# Altium PCB PCB_2021-01-04_23-32-29_2021-01-05_00-56-48.pcbdoc
Units mm, origin at the board's own origin, x right, y up, seen from the top; angles counter-clockwise.
Board outline 70 x 40 mm, 2 copper layers (Top Layer, Bottom Layer); 93 components, 84 nets, 344 pads, 48 vias.
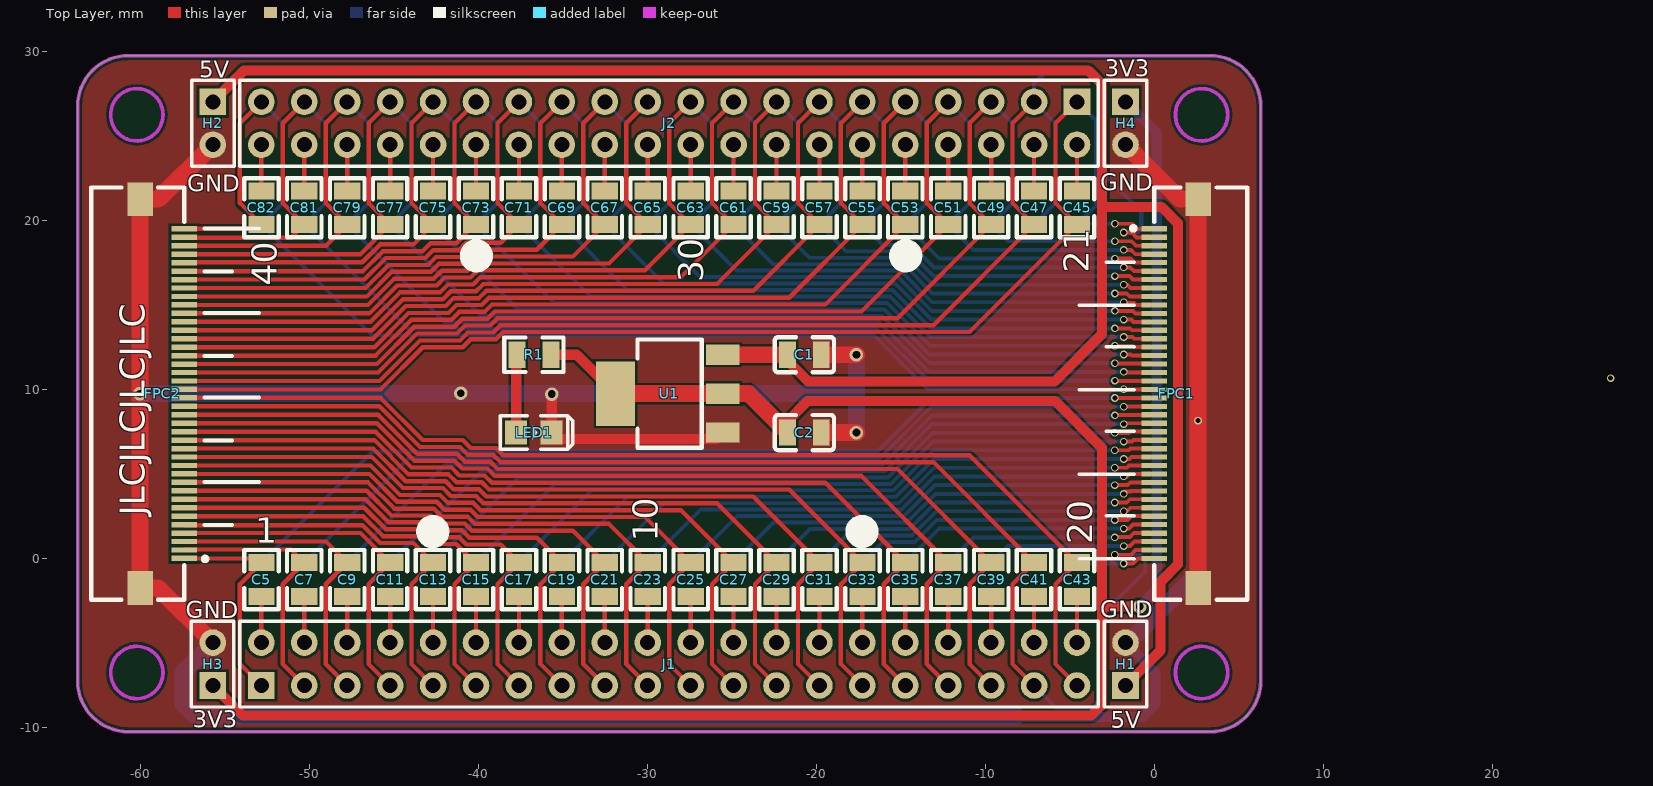
[diagram p0: Top Layer view]
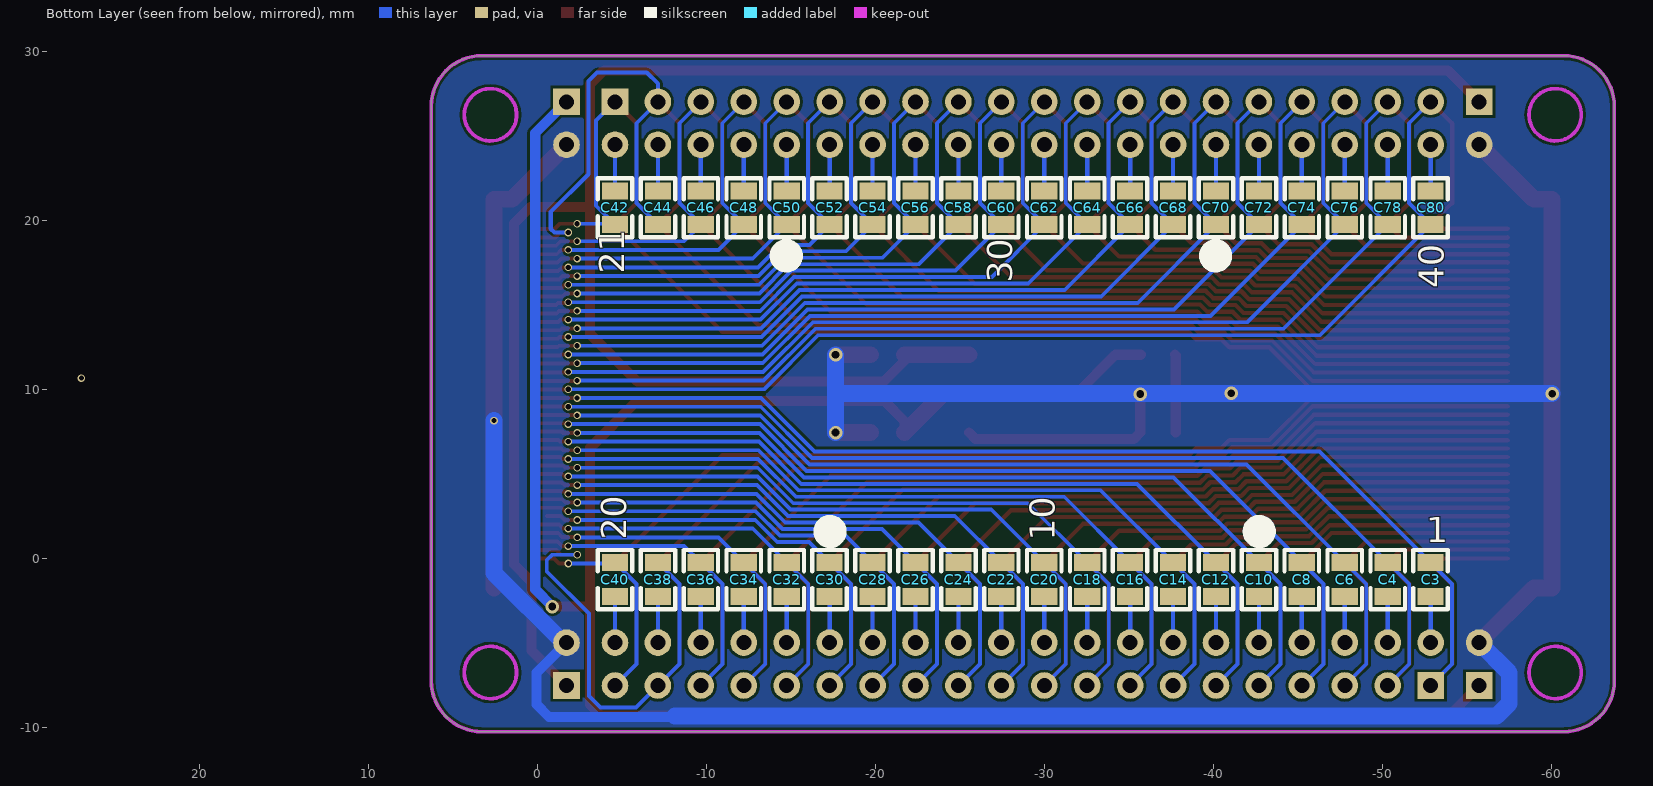
[diagram p1: Bottom Layer view, seen from below]

## Layer stack, top to bottom
Top Solder: solder mask 0.0102, Solder Resist, Dk 3.5
Top Layer: signal copper 0.0356
Dielectric1: dielectric 0.32, FR-4, Dk 4.8
Bottom Layer: signal copper 0.0356
Bottom Solder: solder mask 0.0102, Solder Resist, Dk 3.5

## Board outline
-63.7,-7.25 -63.7,26.75 cw(c-60.7,26.75) -60.7,29.75 3.3,29.75 cw(c3.3,26.75) 6.3,26.75 6.3,-7.25 cw(c3.3,-7.25) 3.3,-10.25 -60.7,-10.25 cw(c-60.7,-7.25)

## Design rules (kind name [scope] priority, off if disabled: settings)
Clearance [All] p1: gap=0.152
PolygonConnect [All] p1: connectstyle=Direct reliefconductorwidth=0.254 reliefentries=4 polygonreliefangle="90 Angle" airgapwidth=0.254
RoutingVias [All] p1: holewidth=0.711 width=1.27 viastyle="Through Hole" minholewidth=0.711 minwidth=1.27 maxholewidth=0.711 maxwidth=1.27
SolderMaskExpansion [All] p1: expansion=0.102
Width [All] p1: maxlimit=1 minlimit=0.152 preferedwidth=0.254
30 further rules are at their usual default settings.

## Components (designator, comment, footprint, x,y, rotation, side; value= is the part's Value field where it differs from the comment)
C1 "0.1u" C0805 -20.7,12.05 r180 top locked
C2 "0.1u" C0805 -20.7,7.45 r180 top locked
C3 "0.1u" R0805 -52.829,-1.25 r90 bottom
C4 "0.1u" R0805 -50.289,-1.25 r90 bottom
C5 "0.1u" R0805 -52.829,-1.25 r90 top locked
C6 "0.1u" R0805 -47.749,-1.25 r90 bottom
C7 "0.1u" R0805 -50.289,-1.25 r90 top locked
C8 "0.1u" R0805 -45.208,-1.25 r90 bottom
C9 "0.1u" R0805 -47.749,-1.25 r90 top locked
C10 "0.1u" R0805 -42.669,-1.25 r90 bottom
C11 "0.1u" R0805 -45.209,-1.25 r90 top locked
C12 "0.1u" R0805 -40.128,-1.25 r90 bottom
C13 "0.1u" R0805 -42.669,-1.25 r90 top locked
C14 "0.1u" R0805 -37.588,-1.25 r90 bottom
C15 "0.1u" R0805 -40.129,-1.25 r90 top locked
C16 "0.1u" R0805 -35.049,-1.25 r90 bottom
C17 "0.1u" R0805 -37.589,-1.25 r90 top locked
C18 "0.1u" R0805 -32.509,-1.25 r90 bottom
C19 "0.1u" R0805 -35.049,-1.25 r90 top locked
C20 "0.1u" R0805 -29.969,-1.25 r90 bottom
C21 "0.1u" R0805 -32.509,-1.25 r90 top locked
C22 "0.1u" R0805 -27.429,-1.25 r90 bottom
C23 "0.1u" R0805 -29.969,-1.25 r90 top locked
C24 "0.1u" R0805 -24.889,-1.25 r90 bottom
C25 "0.1u" R0805 -27.428,-1.25 r90 top locked
C26 "0.1u" R0805 -22.349,-1.25 r90 bottom
C27 "0.1u" R0805 -24.889,-1.25 r90 top locked
C28 "0.1u" R0805 -19.809,-1.25 r90 bottom
C29 "0.1u" R0805 -22.349,-1.25 r90 top locked
C30 "0.1u" R0805 -17.269,-1.25 r90 bottom
C31 "0.1u" R0805 -19.809,-1.25 r90 top locked
C32 "0.1u" R0805 -14.729,-1.25 r90 bottom
C33 "0.1u" R0805 -17.268,-1.25 r90 top locked
C34 "0.1u" R0805 -12.189,-1.25 r90 bottom
C35 "0.1u" R0805 -14.729,-1.25 r90 top locked
C36 "0.1u" R0805 -9.649,-1.25 r90 bottom
C37 "0.1u" R0805 -12.188,-1.25 r90 top locked
C38 "0.1u" R0805 -7.109,-1.25 r90 bottom
C39 "0.1u" R0805 -9.648,-1.25 r90 top locked
C40 "0.1u" R0805 -4.569,-1.25 r90 bottom
C41 "0.1u" R0805 -7.109,-1.25 r90 top locked
C42 "0.1u" R0805 -4.569,20.75 r270 bottom
C43 "0.1u" R0805 -4.569,-1.25 r90 top locked
C44 "0.1u" R0805 -7.109,20.75 r270 bottom
C45 "0.1u" R0805 -4.569,20.75 r270 top
C46 "0.1u" R0805 -9.649,20.75 r270 bottom
C47 "0.1u" R0805 -7.109,20.75 r270 top locked
C48 "0.1u" R0805 -12.189,20.75 r270 bottom
C49 "0.1u" R0805 -9.649,20.75 r270 top locked
C50 "0.1u" R0805 -14.729,20.75 r270 bottom
C51 "0.1u" R0805 -12.189,20.75 r270 top locked
C52 "0.1u" R0805 -17.269,20.75 r270 bottom
C53 "0.1u" R0805 -14.729,20.75 r270 top locked
C54 "0.1u" R0805 -19.809,20.75 r270 bottom
C55 "0.1u" R0805 -17.269,20.75 r270 top locked
C56 "0.1u" R0805 -22.349,20.75 r270 bottom
C57 "0.1u" R0805 -19.809,20.75 r270 top locked
C58 "0.1u" R0805 -24.889,20.75 r270 bottom
C59 "0.1u" R0805 -22.349,20.75 r270 top locked
C60 "0.1u" R0805 -27.429,20.75 r270 bottom
C61 "0.1u" R0805 -24.889,20.75 r270 top locked
C62 "0.1u" R0805 -29.969,20.75 r270 bottom
C63 "0.1u" R0805 -27.429,20.75 r270 top locked
C64 "0.1u" R0805 -32.509,20.75 r270 bottom
C65 "0.1u" R0805 -29.969,20.75 r270 top locked
C66 "0.1u" R0805 -35.049,20.75 r270 bottom
C67 "0.1u" R0805 -32.509,20.75 r270 top locked
C68 "0.1u" R0805 -37.589,20.75 r270 bottom
C69 "0.1u" R0805 -35.049,20.75 r270 top locked
C70 "0.1u" R0805 -40.129,20.75 r270 bottom
C71 "0.1u" R0805 -37.589,20.75 r270 top locked
C72 "0.1u" R0805 -42.669,20.75 r270 bottom
C73 "0.1u" R0805 -40.129,20.75 r270 top locked
C74 "0.1u" R0805 -45.209,20.75 r270 bottom
C75 "0.1u" R0805 -42.669,20.75 r270 top locked
C76 "0.1u" R0805 -47.749,20.75 r270 bottom
C77 "0.1u" R0805 -45.209,20.75 r270 top locked
C78 "0.1u" R0805 -50.289,20.75 r270 bottom
C79 "0.1u" R0805 -47.749,20.75 r270 top locked
C80 "0.1u" R0805 -52.829,20.75 r270 bottom
C81 "0.1u" R0805 -50.289,20.75 r270 top locked
C82 "0.1u" R0805 -52.829,20.75 r270 top locked
FPC1 "XW05200-40" FPC-SMD_40P-P0.50_XW05200-40#1 1.3,9.75 r90 top
FPC2 "XW05200-40" FPC-SMD_40P-P0.50_XW05200-40#2 -58.7,9.75 r270 top locked
H1 "HDR-F-2.54_1x2" HDR-F-2.54_1X2 -1.7,-6.25 r90 top locked
H2 "HDR-F-2.54_1x2" HDR-F-2.54_1X2 -55.7,25.75 r270 top locked
H3 "HDR-F-2.54_1x2" HDR-F-2.54_1X2 -55.7,-6.25 r90 top locked
H4 "HDR-F-2.54_1x2" HDR-F-2.54_1X2 -1.7,25.75 r270 top locked
J1 "HDR-M-2.54_2x20" HDR-M-2.54_2X20 -28.7,-6.25 r0 top locked
J2 "HDR-M-2.54_2x20" HDR-M-2.54_2X20 -28.7,25.75 r180 top locked
LED1 "LED-0805_G" LED0805_GREEN -36.7,7.45 r0 top
R1 "1k" R0805 -36.7,12.05 r180 top
U1 "AMS1117-2.5" SOT-223-4_L6.5-W3.5-P2.30-LS7.0-BR -28.7,9.75 r0 top locked

## Footprints (in the part's own frame and the unit in brackets; to place one, negate y for a bottom-side part, rotate by r counter-clockwise, add the part's x,y. Pads: shape width x height; smd on the part's side, far side on the other; paste and mask are expansions set on the pad)
C0805 [mm]
  rect 1x1.55 smd: 1(-1,0) 2(1,0)
  silkscreen extent -1.75,-1.04 1.75,1.04
FPC-SMD_40P-P0.50_XW05200-40#1 [mm]
  rect 0.32x1.5 smd: 1(9.75,1.3) 2(9.25,1.3) 6(7.25,1.3) 13(3.75,1.3) 23(-1.25,1.3) 24(-1.75,1.3) 25(-2.25,1.3) 26(-2.75,1.3) 27(-3.25,1.3) 28(-3.75,1.3) 29(-4.25,1.3) 34(-6.75,1.3) 35(-7.25,1.3) 37(-8.25,1.3) 38(-8.75,1.3)
  rect 0.3x1.5 smd: 3(8.75,1.3) 4(8.25,1.3) 5(7.75,1.3) 7(6.75,1.3) 8(6.25,1.3) 9(5.75,1.3) 10(5.25,1.3) 11(4.75,1.3) 12(4.25,1.3) 14(3.25,1.3) 15(2.75,1.3) 16(2.25,1.3) 17(1.75,1.3) 18(1.25,1.3) 19(0.75,1.3) 20(0.25,1.3) 21(-0.25,1.3) 22(-0.75,1.3) 30(-4.75,1.3) 31(-5.25,1.3) 32(-5.75,1.3) 33(-6.25,1.3) 36(-7.75,1.3) 39(-9.25,1.3) 40(-9.75,1.3)
  rect 2x1.5 smd: 41(-11.5,-1.3) 42(11.5,-1.3)
  silkscreen extent -12.2,-4.2 12.2,2.67
FPC-SMD_40P-P0.50_XW05200-40#2 [mm]
  rect 0.32x1.5 smd: 1(9.75,1.3) 2(9.25,1.3) 3(8.75,1.3) 4(8.25,1.3) 5(7.75,1.3) 6(7.25,1.3) 7(6.75,1.3) 8(6.25,1.3) 9(5.75,1.3) 10(5.25,1.3) 11(4.75,1.3) 12(4.25,1.3) 13(3.75,1.3) 14(3.25,1.3) 15(2.75,1.3) 16(2.25,1.3) 17(1.75,1.3) 18(1.25,1.3) 19(0.75,1.3) 20(0.25,1.3) 21(-0.25,1.3) 22(-0.75,1.3) 23(-1.25,1.3) 24(-1.75,1.3) 25(-2.25,1.3) 26(-2.75,1.3) 27(-3.25,1.3) 28(-3.75,1.3) 29(-4.25,1.3) 30(-4.75,1.3) 31(-5.25,1.3) 32(-5.75,1.3) 33(-6.25,1.3) 34(-6.75,1.3) 35(-7.25,1.3) 36(-7.75,1.3) 37(-8.25,1.3) 38(-8.75,1.3) 39(-9.25,1.3) 40(-9.75,1.3)
  rect 2x1.5 smd: 41(-11.5,-1.3) 42(11.5,-1.3)
  silkscreen extent -12.2,-4.2 12.2,2.67
HDR-F-2.54_1X2 [mil]
  rect 62x62 hole 35: 1(-50,0)
  round 62 hole 35: 2(50,0)
  silkscreen extent -100,-49 100,50
HDR-M-2.54_2X20 [mil]
  rect 62x62 hole 35: 1(-950,-50)
  round 62 hole 35: 2(-950,50) 3(-850,-50) 4(-850,50) 5(-750,-50) 6(-750,50) 7(-650,-50) 8(-650,50) 9(-550,-50) 10(-550,50) 11(-450,-50) 12(-450,50) 13(-350,-50) 14(-350,50) 15(-250,-50) 16(-250,50) 17(-150,-50) 18(-150,50) 19(-50,-50) 20(-50,50) 21(50,-50) 22(50,50) 23(150,-50) 24(150,50) 25(250,-50) 26(250,50) 27(350,-50) 28(350,50) 29(450,-50) 30(450,50) 31(550,-50) 32(550,50) 33(650,-50) 34(650,50) 35(750,-50) 36(750,50) 37(850,-50) 38(850,50) 39(950,-50) 40(950,50)
  silkscreen extent -1000,-100 1000,100
LED0805_GREEN [mm]
  rect 1.3x1.4 smd: 1(-1.05,0) 2(1.05,0)
  silkscreen extent -2,-1 2.3,1
R0805 [mm]
  rect 1x1.55 smd: 1(-1,0) 2(1,0)
  silkscreen extent -1.75,-1.02 1.75,1.02
SOT-223-4_L6.5-W3.5-P2.30-LS7.0-BR [mm]
  rect 2x1.2 smd: 1(3.175,-2.3) 2(3.175,0) 3(3.175,2.3)
  rect 2.3x3.8 smd: 4(-3.175,0)
  silkscreen extent -1.87,-3.2 1.93,3.2

## Via types
v1: diameter 0.45, hole 0.305, Top Layer to Bottom Layer, tented both sides, 42 vias
v2: diameter 0.8, hole 0.45, Top Layer to Bottom Layer, tented both sides, 6 vias

## Nets (pads, with @x,y where several pads share a name; then routed paths per layer and width w, separated by ;. In a path a pad name is that pad's centre, name@x,y a point inside that pad or via, vN(x,y) a via of type N, cw(c..) or ccw(c..) an arc to the next point about the centre after c; other vN are vias at no path point)
FFC_1: C3.1 C5.1 J1.2 | length 5.5
  Top Layer w0.254: J1.2 C5.1
  Bottom Layer w0.254: J1.2 C3.1@-52.83,-2.251
FFC_2: C4.1 C7.1 J1.4 | length 8.2
  Top Layer w0.254: J1.4 C7.1
  Bottom Layer w0.254: J1.4 -50.29,-2.251 J1.4
FFC_3: C6.1 C9.1 J1.6 | length 8.2
  Top Layer w0.254: J1.6 C9.1
  Bottom Layer w0.254: J1.6 -47.75,-2.251 J1.6
FFC_4: C8.1 C11.1 J1.8 | length 8.2
  Top Layer w0.254: J1.8 C11.1
  Bottom Layer w0.254: J1.8 -45.21,-2.251 J1.8
FFC_5: C10.1 C13.1 J1.10 | length 5.5
  Top Layer w0.254: J1.10 C13.1
  Bottom Layer w0.254: J1.10 C10.1@-42.67,-2.251
FFC_6: C12.1 C15.1 J1.12 | length 5.5
  Top Layer w0.254: J1.12 C15.1
  Bottom Layer w0.254: J1.12 C12.1@-40.13,-2.251
FFC_7: C14.1 C17.1 J1.14 | length 5.5
  Top Layer w0.254: J1.14 C17.1
  Bottom Layer w0.254: J1.14 C14.1@-37.59,-2.251
FFC_8: C16.1 C19.1 J1.16 | length 5.5
  Top Layer w0.254: J1.16 C19.1
  Bottom Layer w0.254: J1.16 C16.1@-35.05,-2.251
FFC_9: C18.1 C21.1 J1.18 | length 5.5
  Top Layer w0.254: J1.18 C21.1
  Bottom Layer w0.254: J1.18 C18.1@-32.51,-2.251
FFC_10: C20.1 C23.1 J1.20 | length 5.5
  Top Layer w0.254: J1.20 C23.1
  Bottom Layer w0.254: J1.20@-29.97,-4.884 C20.1@-29.97,-2.155
FFC_11: C22.1 C25.1 J1.22 | length 5.5
  Top Layer w0.254: J1.22 C25.1
  Bottom Layer w0.254: J1.22@-27.43,-4.884 C22.1@-27.43,-2.155
FFC_12: C24.1 C27.1 J1.24 | length 5.5
  Top Layer w0.254: J1.24 C27.1
  Bottom Layer w0.254: J1.24@-24.89,-4.884 C24.1@-24.89,-2.155
FFC_13: C26.1 C29.1 J1.26 | length 8.2
  Top Layer w0.254: J1.26 C29.1
  Bottom Layer w0.254: J1.26 C26.1@-22.35,-2.251 ; J1.26@-22.35,-4.884 C26.1@-22.35,-2.155
FFC_14: C28.1 C31.1 J1.28 | length 8.2
  Top Layer w0.254: J1.28 C31.1
  Bottom Layer w0.254: J1.28 -19.81,-2.251 J1.28
FFC_15: C30.1 C33.1 J1.30 | length 8.2
  Top Layer w0.254: J1.30 C33.1
  Bottom Layer w0.254: J1.30 -17.27,-2.251 J1.30
FFC_16: C32.1 C35.1 J1.32 | length 5.5
  Top Layer w0.254: J1.32 C35.1
  Bottom Layer w0.254: J1.32 C32.1@-14.73,-2.251
FFC_17: C34.1 C37.1 J1.34 | length 5.5
  Top Layer w0.254: J1.34 C37.1
  Bottom Layer w0.254: J1.34 C34.1@-12.19,-2.251
FFC_18: C36.1 C39.1 J1.36 | length 5.5
  Top Layer w0.254: J1.36 C39.1
  Bottom Layer w0.254: J1.36 C36.1@-9.65,-2.251
FFC_19: C38.1 C41.1 J1.38 | length 5.5
  Top Layer w0.254: J1.38 C41.1
  Bottom Layer w0.254: J1.38 C38.1@-7.11,-2.251
FFC_20: C40.1 C43.1 J1.40 | length 5.5
  Top Layer w0.254: J1.40 C43.1
  Bottom Layer w0.254: J1.40 C40.1@-4.57,-2.251
FFC_21: C42.1 C45.1 J2.2 | length 5.5
  Top Layer w0.254: C45.1@-4.569,21.749 J2.2@-4.569,24.48
  Bottom Layer w0.254: C42.1 J2.2
FFC_22: C44.1 C47.1 J2.4 | length 8.2
  Top Layer w0.254: C47.1@-7.109,21.749 J2.4@-7.109,24.48
  Bottom Layer w0.254: C44.1 J2.4 C44.1
FFC_23: C46.1 C49.1 J2.6 | length 8.2
  Top Layer w0.254: C49.1@-9.649,21.749 J2.6@-9.649,24.48
  Bottom Layer w0.254: C46.1 J2.6 C46.1
FFC_24: C48.1 C51.1 J2.8 | length 8.2
  Top Layer w0.254: C51.1@-12.189,21.749 J2.8@-12.189,24.48
  Bottom Layer w0.254: C48.1 J2.8 C48.1
FFC_25: C50.1 C53.1 J2.10 | length 5.5
  Top Layer w0.254: C53.1@-14.729,21.749 J2.10@-14.729,24.48
  Bottom Layer w0.254: C50.1 J2.10
FFC_26: C52.1 C55.1 J2.12 | length 5.5
  Top Layer w0.254: C55.1@-17.269,21.749 J2.12@-17.269,24.48
  Bottom Layer w0.254: C52.1 J2.12
FFC_27: C54.1 C57.1 J2.14 | length 5.5
  Top Layer w0.254: C57.1@-19.809,21.749 J2.14@-19.809,24.48
  Bottom Layer w0.254: C54.1 J2.14
FFC_28: C56.1 C59.1 J2.16 | length 5.5
  Top Layer w0.254: C59.1@-22.349,21.749 J2.16@-22.349,24.48
  Bottom Layer w0.254: C56.1 J2.16
FFC_29: C58.1 C61.1 J2.18 | length 5.5
  Top Layer w0.254: C61.1@-24.889,21.749 J2.18@-24.889,24.48
  Bottom Layer w0.254: C58.1 J2.18
FFC_30: C60.1 C63.1 J2.20 | length 5.5
  Top Layer w0.254: C63.1@-27.429,21.749 J2.20@-27.429,24.48
  Bottom Layer w0.254: C60.1@-27.43,21.655 J2.20@-27.43,24.384
FFC_31: C62.1 C65.1 J2.22 | length 5.5
  Top Layer w0.254: C65.1@-29.969,21.749 J2.22@-29.969,24.48
  Bottom Layer w0.254: C62.1@-29.97,21.655 J2.22@-29.97,24.384
FFC_32: C64.1 C67.1 J2.24 | length 5.5
  Top Layer w0.254: C67.1@-32.509,21.749 J2.24@-32.509,24.48
  Bottom Layer w0.254: C64.1@-32.51,21.655 J2.24@-32.51,24.384
FFC_33: C66.1 C69.1 J2.26 | length 8.2
  Top Layer w0.254: C69.1@-35.049,21.749 J2.26@-35.049,24.48
  Bottom Layer w0.254: C66.1@-35.05,21.655 J2.26@-35.05,24.384 ; C66.1 J2.26
FFC_34: C68.1 C71.1 J2.28 | length 8.2
  Top Layer w0.254: C71.1 J2.28@-37.589,24.48
  Bottom Layer w0.254: C68.1 J2.28 C68.1
FFC_35: C70.1 C73.1 J2.30 | length 8.2
  Top Layer w0.254: C73.1 J2.30@-40.129,24.48
  Bottom Layer w0.254: C70.1 J2.30 C70.1
FFC_36: C72.1 C75.1 J2.32 | length 5.5
  Top Layer w0.254: C75.1@-42.669,21.749 J2.32@-42.669,24.48
  Bottom Layer w0.254: C72.1 J2.32
FFC_37: C74.1 C77.1 J2.34 | length 5.5
  Top Layer w0.254: C77.1 J2.34@-45.209,24.48
  Bottom Layer w0.254: C74.1 J2.34
FFC_38: C76.1 C79.1 J2.36 | length 5.5
  Top Layer w0.254: C79.1 J2.36@-47.749,24.48
  Bottom Layer w0.254: C76.1 J2.36
FFC_39: C78.1 C81.1 J2.38 | length 5.5
  Top Layer w0.254: C81.1 J2.38@-50.289,24.48
  Bottom Layer w0.254: C78.1 J2.38
FFC_40: C80.1 C82.1 J2.40 | length 5.5
  Top Layer w0.254: C82.1 J2.40@-52.829,24.48
  Bottom Layer w0.254: C80.1 J2.40
FPC_1: C3.2 C5.2 FPC1.21 FPC2.1 J1.1 | length 78.2
  Top Layer w0.23: v1@-2.323,9.5 FPC1.21
  Top Layer w0.254: FPC2.1 -53.079,0 C5.2 ; J1.1 -54.102,-6.248 -54.102,-1.523 C5.2
  Bottom Layer w0.23: J1.1 -54.102,-6.248 -54.102,-1.523 C3.2 -46.254,6.325 -16.383,6.325 -13.215,9.492 v1(-2.331,9.492)
FPC_2: C4.2 C7.2 FPC1.22 FPC2.2 J1.3 | length 78.2
  Top Layer w0.23: v1@-1.783,9 FPC1.22
  Top Layer w0.254: FPC2.2 -57.4,0.529 -51.068,0.529 C7.2 ; J1.3 -51.562,-6.248 -51.562,-1.523 C7.2
  Bottom Layer w0.23: J1.3 -51.562,-6.248 -51.562,-1.523 C4.2 -44.096,5.943 -16.225,5.943 -13.191,8.977 v1(-1.806,8.977)
FPC_3: C6.2 C9.2 FPC1.23 FPC2.3 J1.5 | length 78.2
  Top Layer w0.23: v1@-2.308,8.485 0,8.485 FPC1.23
  Top Layer w0.254: FPC2.3 -48.999,1 C9.2 ; J1.5 -49.022,-6.248 -49.022,-1.523 C9.2
  Bottom Layer w0.23: J1.5 -49.022,-6.248 -49.022,-1.523 C6.2 -41.938,5.561 -16.067,5.561 -13.166,8.461 v1(-2.331,8.461)
FPC_4: C8.2 C11.2 FPC1.24 FPC2.4 J1.7 | length 78.1
  Top Layer w0.23: v1@-1.752,8 FPC1.24
  Top Layer w0.254: FPC2.4 -46.959,1.5 C11.2 ; J1.7 -46.482,-6.248 -46.482,-1.523 C11.2
  Bottom Layer w0.23: J1.7 -46.482,-6.248 -46.482,-1.523 C8.2 -39.78,5.179 -15.908,5.179 -13.141,7.946 v1(-1.806,7.946)
FPC_5: C10.2 C13.2 FPC1.25 FPC2.5 J1.9 | length 78.2
  Top Layer w0.23: v1(-2.331,7.431) -1.48,7.431 ; -1.48,7.5 FPC1.25
  Top Layer w0.254: FPC2.5 -57.4,1.971 -46.856,1.971 -45.8,0.916 -43.834,0.916 C13.2 ; J1.9 -43.942,-6.248 -43.942,-1.523 C13.2
  Bottom Layer w0.23: J1.9 -43.942,-6.248 -43.942,-1.523 C10.2 -37.622,4.797 -15.75,4.797 -13.116,7.431 v1(-2.331,7.431)
FPC_6: C12.2 C15.2 FPC1.26 FPC2.6 J1.11 | length 78.2
  Top Layer w0.23: v1(-1.806,6.915) -1.314,6.915 -1.229,7 FPC1.26
  Top Layer w0.254: FPC2.6 -46.811,2.501 -45.632,1.322 -43.298,1.322 -42.827,0.851 -41.3,0.851 -40.199,-0.25 C15.2 ; J1.11 -41.402,-6.248 -41.402,-1.523 C15.2
  Bottom Layer w0.23: J1.11 -41.402,-6.248 -41.402,-1.523 C12.2 -35.464,4.415 -15.592,4.415 -13.091,6.915 v1(-1.806,6.915)
FPC_7: C14.2 C17.2 FPC1.27 FPC2.7 J1.13 | length 78.2
  Top Layer w0.23: v1(-2.331,6.4) -1.499,6.4 -1.398,6.5 FPC1.27
  Top Layer w0.254: FPC2.7 -46.737,3.001 -45.464,1.728 -43.13,1.728 -42.659,1.257 -41.132,1.257 -40.701,0.827 -38.665,0.827 C17.2 ; J1.13 -38.862,-6.248 -38.862,-1.523 C17.2
  Bottom Layer w0.23: J1.13 -38.862,-6.248 -38.862,-1.523 C14.2 -33.306,4.033 -15.434,4.033 -13.066,6.4 v1(-2.331,6.4)
FPC_8: C16.2 C19.2 FPC1.28 FPC2.8 J1.15 | length 78.2
  Top Layer w0.23: v1(-1.806,5.885) -1.473,5.885 -1.357,6 FPC1.28
  Top Layer w0.254: FPC2.8 -46.662,3.501 -45.296,2.134 -42.962,2.134 -42.491,1.663 -40.963,1.663 -40.533,1.233 -36.531,1.233 C19.2 ; J1.15 -36.322,-6.248 -36.322,-1.523 C19.2
  Bottom Layer w0.23: J1.15 -36.322,-6.248 -36.322,-1.523 C16.2 -31.148,3.651 -15.275,3.651 -13.041,5.885 v1(-1.806,5.885)
FPC_9: C18.2 C21.2 FPC1.29 FPC2.9 J1.17 | length 78.2
  Top Layer w0.23: v1(-2.331,5.369) -1.621,5.369 -1.49,5.5 FPC1.29
  Top Layer w0.254: FPC2.9 -46.588,4.001 -45.127,2.54 -42.793,2.54 -42.323,2.069 -40.795,2.069 -40.365,1.639 -34.397,1.639 C21.2 ; J1.17 -33.782,-6.248 -33.782,-1.523 C21.2
  Bottom Layer w0.23: J1.17 -33.782,-6.248 -33.782,-1.523 C18.2 -28.99,3.269 -15.117,3.269 -13.017,5.369 v1(-2.331,5.369)
FPC_10: C20.2 C23.2 FPC1.30 FPC2.10 J1.19 | length 78.2
  Top Layer w0.23: v1(-1.806,4.854) -1.596,4.854 -1.45,5 FPC1.30
  Top Layer w0.254: FPC2.10@-57.4,4.501 -46.514,4.501 -44.959,2.946 -42.625,2.946 -42.154,2.475 -40.627,2.475 -40.197,2.045 -32.263,2.045 C23.2 ; J1.19 -31.242,-6.248 -31.242,-1.523 C23.2
  Bottom Layer w0.23: J1.19 -31.242,-6.248 -31.242,-1.523 C20.2 -26.832,2.887 -14.959,2.887 -12.992,4.854 v1(-1.806,4.854)
FPC_11: C22.2 C25.2 FPC1.31 FPC2.11 J1.21 | length 78.2
  Top Layer w0.23: v1(-2.331,4.338) -1.571,4.338 -1.41,4.5 FPC1.31
  Top Layer w0.254: FPC2.11 -46.44,5.001 -44.791,3.352 -42.457,3.352 -41.986,2.881 -40.459,2.881 -40.029,2.451 -30.129,2.451 C25.2 ; J1.21 -28.702,-6.248 -28.702,-1.523 C25.2
  Bottom Layer w0.23: J1.21 -28.702,-6.248 -28.702,-1.523 C22.2 -24.674,2.505 -14.801,2.505 -12.967,4.338 v1(-2.331,4.338)
FPC_12: C24.2 C27.2 FPC1.32 FPC2.12 J1.23 | length 78.2
  Top Layer w0.23: v1(-1.806,3.823) -1.673,3.956 -1.413,3.956 -1.369,4 FPC1.32
  Top Layer w0.254: FPC2.12 -46.366,5.501 -44.623,3.758 -42.259,3.758 -41.788,3.287 -40.291,3.287 -39.861,2.857 -27.995,2.857 C27.2 ; J1.23 -26.162,-6.248 -26.162,-1.523 C27.2
  Bottom Layer w0.23: J1.23 -26.162,-6.248 -26.162,-1.523 C24.2 -22.516,2.123 -14.642,2.123 -12.942,3.823 v1(-1.806,3.823)
FPC_13: C26.2 C29.2 FPC1.33 FPC2.13 J1.25 | length 78.2
  Top Layer w0.23: v1(-2.331,3.308) -1.626,3.308 -1.433,3.5 FPC1.33
  Top Layer w0.254: FPC2.13 -46.292,6.001 -44.455,4.164 -42.091,4.164 -41.62,3.693 -40.122,3.693 -39.692,3.263 -25.861,3.263 C29.2 ; J1.25 -23.622,-6.248 -23.622,-1.523 C29.2
  Bottom Layer w0.23: J1.25 -23.622,-6.248 -23.622,-1.523 C26.2 -20.358,1.741 -14.484,1.741 -12.917,3.308 v1(-2.331,3.308)
FPC_14: C28.2 C31.2 FPC1.34 FPC2.14 J1.27 | length 78.2
  Top Layer w0.23: v1(-1.806,2.792) -1.601,2.792 -1.393,3 FPC1.34
  Top Layer w0.254: FPC2.14 -46.217,6.501 -44.287,4.57 -41.923,4.57 -41.452,4.099 -39.954,4.099 -39.524,3.669 -23.727,3.669 C31.2 ; J1.27 -21.082,-6.248 -21.082,-1.523 C31.2
  Bottom Layer w0.23: J1.27 -21.082,-6.248 -21.082,-1.523 C28.2 -18.2,1.359 -14.326,1.359 -12.892,2.792 v1(-1.806,2.792)
FPC_15: C30.2 C33.2 FPC1.35 FPC2.15 J1.29 | length 77.7
  Top Layer w0.23: v1(-2.331,2.277) -1.576,2.277 -1.352,2.5 FPC1.35@-0.533,2.5
  Top Layer w0.254: FPC2.15 -46.143,7.001 -44.118,4.976 -41.755,4.976 -41.284,4.505 -39.786,4.505 -39.356,4.075 -21.593,4.075 C33.2 ; J1.29 -18.542,-6.248 -18.542,-1.523 C33.2
  Bottom Layer w0.23: J1.29 -18.542,-6.248 -18.542,-1.523 C30.2 ; C30.2 -16.042,0.977 -14.168,0.977 -12.867,2.277 v1(-2.331,2.277)
FPC_16: C32.2 C35.2 FPC1.36 FPC2.16 J1.31 | length 78.2
  Top Layer w0.23: v1(-1.806,1.762) -1.49,1.762 -1.251,2 FPC1.36
  Top Layer w0.254: FPC2.16@-57.4,7.501 -46.069,7.501 -43.95,5.382 -41.586,5.382 -41.116,4.911 -39.618,4.911 -39.188,4.481 -19.459,4.481 C35.2 ; J1.31 -16.002,-6.248 -16.002,-1.523 C35.2
  Bottom Layer w0.23: J1.31 -16.002,-6.248 -16.002,-1.523 C32.2 -12.717,1.762 v1(-1.806,1.762)
FPC_17: C34.2 C37.2 FPC1.37 FPC2.17 J1.33 | length 78.2
  Top Layer w0.23: v1(-2.331,1.246) -2.308,1.27 -1.441,1.27 -1.211,1.5 FPC1.37
  Top Layer w0.254: FPC2.17@-57.4,8.001 -45.995,8.001 -43.782,5.788 -41.418,5.788 -40.947,5.317 -39.45,5.317 -39.02,4.887 -17.325,4.887 C37.2 ; J1.33 -13.462,-6.248 -13.462,-1.523 C37.2
  Bottom Layer w0.23: J1.33 -13.462,-6.248 -13.462,-1.523 C34.2 -10.692,1.246 v1(-2.331,1.246)
FPC_18: C36.2 C39.2 FPC1.38 FPC2.18 J1.35 | length 78.2
  Top Layer w0.23: v1(-1.806,0.731) -1.44,0.731 -1.171,1 FPC1.38
  Top Layer w0.254: FPC2.18 -45.921,8.5 -43.614,6.194 -41.25,6.194 -40.779,5.723 -39.282,5.723 -38.852,5.293 -15.191,5.293 C39.2 ; J1.35 -10.922,-6.248 -10.922,-1.523 C39.2
  Bottom Layer w0.23: J1.35 -10.922,-6.248 -10.922,-1.523 C36.2 -8.668,0.731 v1(-1.806,0.731)
FPC_19: C38.2 C41.2 FPC1.39 FPC2.19 J1.37 | length 89.1
  Top Layer w0.23: v1(-2.331,0.215) -1.385,0.215 -1.1,0.5 FPC1.39
  Top Layer w0.254: FPC2.19 -45.846,9 -43.446,6.6 -41.082,6.6 -40.611,6.129 -39.113,6.129 -38.683,5.699 -13.057,5.699 C41.2 ; J1.37 -8.382,-6.248 -8.382,-1.523 C41.2
  Bottom Layer w0.23: C38.2 -8.382,-1.523 -8.382,-6.248 J1.37 -5.816,-8.814 -3.708,-8.814 -3.023,-8.128 -3.023,-3.251 -0.533,-0.762 -0.533,-0.102 -0.85,0.215 v1(-2.331,0.215)
FPC_20: C40.2 C43.2 FPC1.40 FPC2.20 J1.39 | length 78.2
  Top Layer w0.254: FPC2.20 -45.772,9.5 -43.278,7.006 -40.914,7.006 -40.443,6.535 -38.945,6.535 -38.515,6.105 -10.923,6.105 C43.2 ; J1.39 -5.842,-6.248 -5.842,-1.523 C43.2 ; v1(-1.808,-0.3) -1.265,-0.3 -0.965,0 FPC1.40
  Bottom Layer w0.23: J1.39 -5.842,-6.248 -5.842,-1.523 C40.2
  Bottom Layer w0.254: C40.2@-4.519,-0.3 v1(-1.808,-0.3)
FPC_21: C42.2 C45.2 FPC1.1 FPC2.21 J2.1 | length 78
  Top Layer w0.23: v1(-2.331,19.8) -1.283,19.8 -0.983,19.5 FPC1.1
  Top Layer w0.254: FPC2.21 -45.772,10 -43.277,12.495 -40.913,12.495 -40.443,12.965 -38.945,12.965 -38.515,13.396 -10.923,13.396 C45.2 -5.842,21.024 -5.842,25.748 J2.1
  Bottom Layer w0.23: C42.2@-4.571,19.75 -3.454,20.867 -3.454,25.905 J2.1 ; C42.2@-4.519,19.8 v1(-2.331,19.8)
FPC_22: C44.2 C47.2 FPC1.2 FPC2.22 J2.3 | length 89.2
  Top Layer w0.23: v1(-1.806,19.284) -1.327,19.284 -1.042,19 FPC1.2
  Top Layer w0.254: FPC2.22 -45.846,10.5 -43.445,12.901 -41.082,12.901 -40.611,13.371 -39.113,13.371 -38.683,13.802 -13.057,13.802 C47.2 -8.382,21.024 -8.382,25.748 J2.3
  Bottom Layer w0.23: C44.2@-7.111,19.75 -5.837,21.024 -5.837,25.748 J2.3
  Bottom Layer w0.254: J2.3 -7.11,28.095 -6.452,28.753 -3.505,28.753 -2.997,28.245 -2.997,22.733 -0.762,20.498 -0.762,19.507 -0.985,19.284 v1(-1.806,19.284)
FPC_23: C46.2 C49.2 FPC1.3 FPC2.23 J2.5 | length 78.2
  Top Layer w0.23: v1(-2.331,18.769) -1.352,18.769 -1.082,18.5 FPC1.3
  Top Layer w0.254: FPC2.23 -45.92,11 -43.614,13.307 -41.25,13.307 -40.779,13.777 -39.281,13.777 -38.851,14.208 -15.191,14.208 C49.2 -10.922,21.024 -10.922,25.748 J2.5
  Bottom Layer w0.23: C46.2@-9.651,19.75 -8.377,21.024 -8.377,25.748 J2.5 ; C46.2 -8.668,18.769 v1(-2.331,18.769)
FPC_24: C48.2 C51.2 FPC1.4 FPC2.24 J2.7 | length 78.2
  Top Layer w0.23: v1(-1.806,18.254) -1.376,18.254 -1.123,18 FPC1.4
  Top Layer w0.254: FPC2.24 -45.995,11.5 -43.782,13.713 -41.418,13.713 -40.947,14.183 -39.449,14.183 -39.019,14.614 -17.325,14.614 C51.2 -13.462,21.024 -13.462,25.748 J2.7
  Bottom Layer w0.23: C48.2@-12.191,19.75 -10.917,21.024 -10.917,25.748 J2.7 ; C48.2 -10.692,18.254 v1(-1.806,18.254)
FPC_25: C50.2 C53.2 FPC1.5 FPC2.25 J2.9 | length 78.2
  Top Layer w0.23: v1(-2.331,17.738) -1.401,17.738 -1.163,17.5 FPC1.5
  Top Layer w0.254: FPC2.25 -46.069,12 -43.95,14.119 -41.586,14.119 -41.115,14.589 -39.618,14.589 -39.188,15.02 -19.459,15.02 C53.2 -16.002,21.024 -16.002,25.748 J2.9
  Bottom Layer w0.23: C50.2@-14.731,19.75 -13.457,21.024 -13.457,25.748 J2.9 ; C50.2 -12.717,17.738 v1(-2.331,17.738)
FPC_26: C52.2 C55.2 FPC1.6 FPC2.26 J2.11 | length 78.2
  Top Layer w0.23: v1(-1.806,17.223) -1.426,17.223 -1.203,17 FPC1.6
  Top Layer w0.254: FPC2.26 -46.143,12.5 -44.118,14.525 -41.754,14.525 -41.283,14.995 -39.786,14.995 -39.356,15.426 -21.593,15.426 C55.2 -18.542,21.024 -18.542,25.748 J2.11
  Bottom Layer w0.23: C52.2@-17.271,19.75 -15.997,21.024 -15.997,25.748 J2.11 ; C52.2 -16.075,18.556 -14.371,18.556 -13.038,17.223 v1(-1.806,17.223)
FPC_27: C54.2 C57.2 FPC1.7 FPC2.27 J2.13 | length 78.2
  Top Layer w0.23: v1(-2.331,16.708) -1.468,16.708 -1.26,16.5 FPC1.7
  Top Layer w0.254: FPC2.27 -46.217,13 -44.286,14.931 -41.922,14.931 -41.452,15.401 -39.954,15.401 -39.524,15.832 -23.727,15.832 C57.2 -21.082,21.024 -21.082,25.748 J2.13
  Bottom Layer w0.23: C54.2@-19.811,19.75 -18.537,21.024 -18.537,25.748 J2.13 ; C54.2 -18.233,18.174 -14.529,18.174 -13.063,16.708 v1(-2.331,16.708)
FPC_28: C56.2 C59.2 FPC1.8 FPC2.28 J2.15 | length 78.2
  Top Layer w0.23: v1(-1.806,16.192) -1.589,16.192 -1.397,16 FPC1.8
  Top Layer w0.254: FPC2.28 -46.291,13.5 -44.454,15.337 -42.091,15.337 -41.62,15.807 -40.122,15.807 -39.692,16.238 -25.861,16.238 C59.2 -23.622,21.024 -23.622,25.748 J2.15
  Bottom Layer w0.23: C56.2@-22.351,19.75 -21.077,21.024 -21.077,25.748 J2.15 ; C56.2 -20.391,17.792 -14.687,17.792 -13.088,16.192 v1(-1.806,16.192)
FPC_29: C58.2 C61.2 FPC1.9 FPC2.29 J2.17 | length 78.2
  Top Layer w0.23: v1(-2.331,15.677) -1.625,15.677 -1.449,15.5 FPC1.9
  Top Layer w0.254: FPC2.29 -46.365,14 -44.623,15.743 -42.259,15.743 -41.788,16.213 -40.29,16.213 -39.86,16.644 -27.995,16.644 C61.2 -26.162,21.024 -26.162,25.748 J2.17
  Bottom Layer w0.23: C58.2@-24.891,19.75 -23.617,21.024 -23.617,25.748 J2.17 ; C58.2 -22.549,17.41 -14.846,17.41 -13.112,15.677 v1(-2.331,15.677)
FPC_30: C60.2 C63.2 FPC1.10 FPC2.30 J2.19 | length 78.2
  Top Layer w0.23: v1(-1.806,15.161) -1.763,15.118 -1.199,15.118 -1.081,15 FPC1.10
  Top Layer w0.254: FPC2.30 -46.44,14.5 -44.791,16.149 -42.457,16.149 -41.986,16.619 -40.459,16.619 -40.028,17.05 -30.129,17.05 C63.2 -28.702,21.024 -28.702,25.748 J2.19
  Bottom Layer w0.23: C60.2@-27.431,19.75 -26.157,21.024 -26.157,25.748 J2.19 ; C60.2 -24.707,17.028 -15.004,17.028 -13.137,15.161 v1(-1.806,15.161)
FPC_31: C62.2 C65.2 FPC1.11 FPC2.31 J2.21 | length 78.2
  Top Layer w0.23: v1(-2.331,14.646) -1.267,14.646 -1.121,14.5 FPC1.11
  Top Layer w0.254: FPC2.31 -46.514,15 -44.959,16.555 -42.625,16.555 -42.154,17.026 -40.627,17.026 -40.197,17.456 -32.263,17.456 C65.2 -31.242,21.024 -31.242,25.748 J2.21
  Bottom Layer w0.23: C62.2@-29.971,19.75 -28.697,21.024 -28.697,25.748 J2.21 ; C62.2 -26.865,16.646 -15.162,16.646 -13.162,14.646 v1(-2.331,14.646)
FPC_32: C64.2 C67.2 FPC1.12 FPC2.32 J2.23 | length 78.2
  Top Layer w0.23: v1(-1.806,14.131) -1.354,14.131 -1.224,14 FPC1.12
  Top Layer w0.254: FPC2.32 -46.588,15.5 -45.127,16.961 -42.793,16.961 -42.322,17.432 -40.795,17.432 -40.365,17.862 -34.397,17.862 C67.2 -33.782,21.024 -33.782,25.748 J2.23
  Bottom Layer w0.23: C64.2@-32.511,19.75 -31.237,21.024 -31.237,25.748 J2.23 ; C64.2 -29.023,16.264 -15.32,16.264 -13.187,14.131 v1(-1.806,14.131)
FPC_33: C66.2 C69.2 FPC1.13 FPC2.33 J2.25 | length 78.2
  Top Layer w0.23: v1(-2.331,13.615) -1.423,13.615 -1.308,13.5 FPC1.13
  Top Layer w0.254: FPC2.33 -46.662,16 -45.295,17.367 -42.961,17.367 -42.49,17.838 -40.963,17.838 -40.533,18.268 -36.531,18.268 C69.2 -36.322,21.024 -36.322,25.748 J2.25
  Bottom Layer w0.23: C66.2@-35.051,19.75 -33.777,21.024 -33.777,25.748 J2.25 ; C66.2 -31.181,15.882 -15.479,15.882 -13.212,13.615 v1(-2.331,13.615)
FPC_34: C68.2 C71.2 FPC1.14 FPC2.34 J2.27 | length 78.2
  Top Layer w0.23: v1(-1.806,13.1) -1.289,13.1 -1.189,13 FPC1.14
  Top Layer w0.254: FPC2.34 -46.736,16.5 -45.463,17.773 -43.129,17.773 -42.659,18.244 -41.131,18.244 -40.701,18.674 -38.665,18.674 C71.2 -38.862,21.024 -38.862,25.748 J2.27
  Bottom Layer w0.23: C68.2@-37.591,19.75 -36.317,21.024 -36.317,25.748 J2.27 ; C68.2 -33.339,15.5 -15.637,15.5 -13.237,13.1 v1(-1.806,13.1)
FPC_35: C70.2 C73.2 FPC1.15 FPC2.35 J2.29 | length 78.2
  Top Layer w0.23: v1(-2.331,12.585) -1.256,12.585 -1.172,12.5 FPC1.15
  Top Layer w0.254: FPC2.35 -46.811,17 -45.632,18.179 -43.298,18.179 -42.827,18.65 -41.299,18.65 -40.199,19.75 C73.2 -41.402,21.024 -41.402,25.748 J2.29
  Bottom Layer w0.23: C70.2@-40.131,19.75 -38.857,21.024 -38.857,25.748 J2.29 ; C70.2 -35.497,15.118 -15.795,15.118 -13.262,12.585 v1(-2.331,12.585)
FPC_36: C72.2 C75.2 FPC1.16 FPC2.36 J2.31 | length 78.2
  Top Layer w0.23: v1(-1.806,12.069) -1.401,12.069 -1.332,12 FPC1.16
  Top Layer w0.254: FPC2.36 -57.4,17.529 -46.855,17.529 -45.8,18.585 -43.834,18.585 C75.2 -43.942,21.024 -43.942,25.748 J2.31
  Bottom Layer w0.23: C72.2@-42.671,19.75 -41.397,21.024 -41.397,25.748 J2.31 ; C72.2 -37.655,14.736 -15.953,14.736 -13.286,12.069 v1(-1.806,12.069)
FPC_37: C74.2 C77.2 FPC1.17 FPC2.37 J2.33 | length 78.2
  Top Layer w0.23: v1@-2.308,11.53 0,11.53 FPC1.17
  Top Layer w0.254: FPC2.37 -46.958,18 C77.2 -46.482,21.024 -46.482,25.748 J2.33
  Bottom Layer w0.23: C74.2@-45.211,19.75 -43.937,21.024 -43.937,25.748 J2.33 ; C74.2 -39.813,14.354 -16.112,14.354 -13.311,11.554 v1(-2.331,11.554)
FPC_38: C76.2 C79.2 FPC1.18 FPC2.38 J2.35 | length 78.1
  Top Layer w0.23: v1@-1.768,11 FPC1.18
  Top Layer w0.254: FPC2.38 -48.998,18.5 C79.2 -49.022,21.024 -49.022,25.748 J2.35
  Bottom Layer w0.23: C76.2@-47.751,19.75 -46.477,21.024 -46.477,25.748 J2.35 ; C76.2 -41.971,13.972 -16.27,13.972 -13.336,11.038 v1(-1.806,11.038)
FPC_39: C78.2 C81.2 FPC1.19 FPC2.39 J2.37 | length 78.2
  Top Layer w0.23: v1@-2.308,10.5 FPC1.19
  Top Layer w0.254: FPC2.39 -57.4,18.971 -51.068,18.971 C81.2 -51.562,21.024 -51.562,25.748 J2.37
  Bottom Layer w0.23: C78.2@-50.291,19.75 -49.017,21.024 -49.017,25.748 J2.37 ; C78.2 -44.129,13.59 -16.428,13.59 -13.361,10.523 v1(-2.331,10.523)
FPC_40: C80.2 C82.2 FPC1.20 FPC2.40 J2.39 | length 78.2
  Top Layer w0.23: v1@-1.798,10 FPC1.20
  Top Layer w0.254: FPC2.40 -53.078,19.5 C82.2 -54.102,21.024 -54.102,25.748 J2.39
  Bottom Layer w0.23: C80.2@-52.831,19.75 -51.557,21.024 -51.557,25.748 J2.39 ; C80.2 -46.287,13.208 -16.586,13.208 -13.386,10.008 v1(-1.806,10.008)
GND: C1.1 C2.1 FPC1.41 FPC1.42 FPC2.41 FPC2.42 H1.2 H2.2 H3.2 H4.2 LED1.2 U1.1 | length 208.8
  Top Layer w0.6: v2(-35.649,9.728) LED1.2 -35.261,7.061 -25.914,7.061 U1.1
  Top Layer w1: H3.2 -58.93,-1.75 FPC2.42 FPC2.41 -58.93,21.25 H2.2 ; C2.1 v2(-17.617,7.45) ; C1.1 v2(-17.617,12.05) ; H4.2 1.53,21.25 FPC1.42 FPC1.41
  Bottom Layer w0.6: -8.103,-9.322 -8.044,-9.381 -0.669,-9.381 0.076,-8.636 0.076,-6.756 H1.2
  Bottom Layer w1: v2(-60.02,9.754) -17.617,9.754 ; H3.2 -57.48,-6.76 -57.48,-8.585 -56.744,-9.322 -8.103,-9.322 ; v2(-17.617,7.45) -17.617,9.754 ; v2(-17.617,12.05) -17.617,9.754 ; H1.2 -1.511,-4.98 2.591,-0.878 v1(2.591,8.153)
  other v2: -41.021,9.779
NetLED1_1: LED1.1 R1.2 | length 4.6
  Top Layer w0.6: LED1.1 -37.75,12 R1.2
VCC: C1.2 H1.1 H2.1 U1.3 | length 126.5
  Top Layer w0.6: H2.1 -53.84,28.88 -3.912,28.88 -3.099,28.067 -3.099,13.259 -5.893,10.465 -20.472,10.465 -21.7,11.692 C1.2 ; -3.099,20.803 0.432,20.803 1.397,19.837 1.397,-0.356 0.381,-1.372 0.381,-5.439 H1.1
  Top Layer w1: U1.3 C1.2
VOUT: C2.2 H3.1 H4.1 R1.1 U1.2 U1.4 | length 138.9
  Top Layer w0.6: H3.1 -53.923,-9.296 -3.734,-9.296 -3.099,-8.661 -3.099,6.553 -5.867,9.322 -20.498,9.322 -21.7,8.12 C2.2 ; R1.1 -34.175,12.05 U1.4 ; -3.048,-2.845 v2(-0.864,-2.845)
  Top Layer w1: U1.4 U1.2 -24,9.75 C2.2
  Bottom Layer w0.6: H4.1 0.152,25.168 0.152,-1.829 v2(-0.864,-2.845)
copper on no net:
  other v1: 27,10.668

## Polygon pours and split planes (outlines as drawn)
GND on Top Layer "Top Layer-No Net" (solid, remove dead copper, pour order 0): -63.678,29.718 4.902,29.718 6.299,28.321 6.299,-8.331 4.394,-10.236 -62.205,-10.236 -63.703,-8.738
GND on Bottom Layer "Top Layer-No Net" (solid, remove dead copper, pour order 2): -63.678,29.718 4.902,29.718 6.299,28.321 6.299,-8.331 4.394,-10.236 -62.205,-10.236 -63.703,-8.738

## Keep-outs
Keep-Out Layer:
  circle w0.22: c-60.2,26.25 r1.55
  circle w0.22: c2.8,26.25 r1.55
  circle w0.22: c2.8,-6.75 r1.55
  circle w0.22: c-60.2,-6.75 r1.55
  lines w0.22: -63.7,-7.25 ccw(c-60.7,-7.25) -60.7,-10.25 3.3,-10.25 ccw(c3.3,-7.25) 6.3,-7.25 6.3,26.75 ccw(c3.3,26.75) 3.3,29.75 -60.7,29.75 ccw(c-60.7,26.75) -63.7,26.75 -63.7,-7.25

## Silkscreen, mask and mechanical layers (free items; w line width, h text height)
Top Overlay:
  circle w1: c-42.69,1.593 r0.483
  circle w1: c-17.29,1.593 r0.483
  circle w1: c-14.707,17.907 r0.483
  circle w1: c-40.107,17.907 r0.483
  lines w0.22: -56.21,1.981 -54.559,1.981 ; -56.21,4.521 -52.959,4.521 ; -56.21,6.981 -54.559,6.981 ; -56.21,9.521 -52.959,9.521 ; -56.21,11.98 -54.559,11.98 ; -56.21,14.52 -52.959,14.52 ; -56.21,16.98 -54.559,16.98 ; -56.21,19.521 -52.959,19.521 ; -4.441,-0.021 -1.19,-0.021 ; -4.441,4.98 -1.19,4.98 ; -4.441,9.979 -1.189,9.979 ; -4.441,14.979 -1.189,14.979 ; -2.841,2.52 -1.19,2.52 ; -2.841,7.52 -1.19,7.52 ; -2.84,12.519 -1.189,12.519 ; -2.84,17.519 -1.189,17.519
  text "3V3" at -2.921,28.499 h1
  text "5V" at -56.49,28.448 h1
  text "GND" at -3.2,21.768 h1
  text "GND" at -57.201,21.692 h1
  text "21" at -3.861,16.891 h1.5 r90
  text "30" at -26.67,16.332 h1.5 r90
  text "40" at -51.918,16.129 h1.5 r90
  text "JLCJLCJLCJLC" at -59.715,2.54 h1.5 r90
  text "10" at -29.362,0.991 h1.5 r90
  text "1" at -53.188,0.914 h1.5
  text "20" at -3.658,0.838 h1.5 r90
  text "GND" at -3.2,-3.505 h1
  text "GND" at -57.302,-3.531 h1
  text "3V3" at -56.896,-10.008 h1
  text "5V" at -2.565,-10.033 h1
Bottom Overlay:
  circle w1: c-40.109,17.907 r0.483
  circle w1: c-14.707,17.907 r0.483
  circle w1: c-17.291,1.593 r0.483
  circle w1: c-42.69,1.593 r0.483
  text "21" at -5.131,16.84 h1.5 r270
  text "30" at -28.067,16.307 h1.5 r270
  text "40" at -53.594,15.977 h1.5 r270
  text "20" at -5.232,1.118 h1.5 r270
  text "10" at -30.582,1.041 h1.5 r270
  text "1" at -52.578,0.965 h1.5
Document:
  lines w0.003: -28.725,9.725 -28.674,9.775